# Altium PCB PCB_TP5400电池充电器测试板_2021-06-21.pcbdoc
Units mil, origin at the board's own origin, x right, y up, seen from the top; angles counter-clockwise.
Board outline 2475 x 2275 mil, 2 copper layers (Top Layer, Bottom Layer); 17 components, 13 nets, 59 pads, 2 vias.
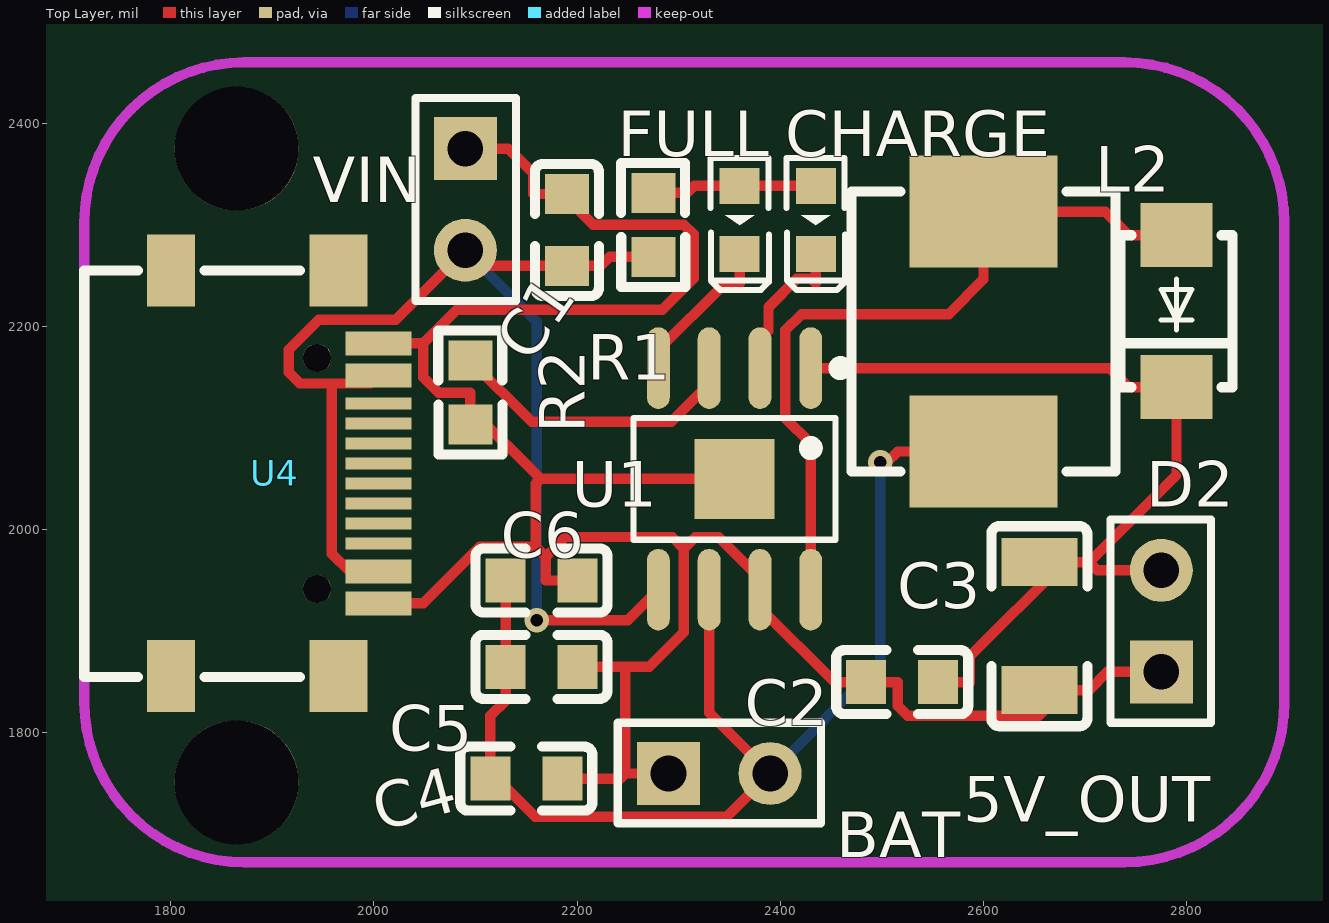
[diagram p0: Top Layer view]
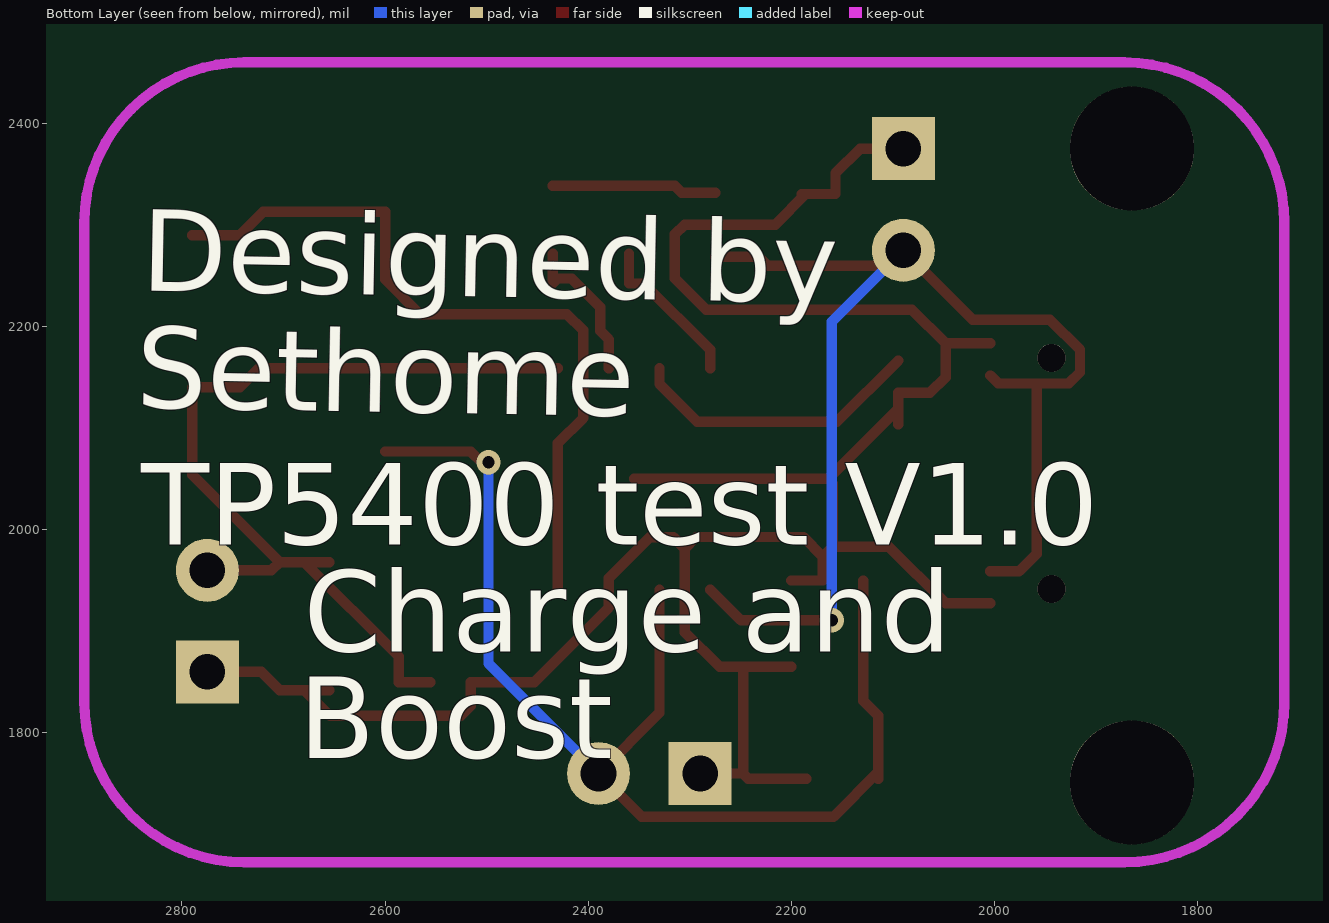
[diagram p1: Bottom Layer view, seen from below]

## Layer stack, top to bottom
Top Layer: signal copper (thickness not stored)
Dielectric: dielectric 12.6, FR-4, Dk 4.8
Bottom Layer: signal copper (thickness not stored)

## Board outline
3475,1000 1000,1000 1000,3275 3475,3275

## Components (designator, comment, footprint, x,y, rotation, side; value= is the part's Value field where it differs from the comment)
5V_OUT "HDR-F-2.54_1x2" HDR-F-2.54_1X2 2775,1910 r90 top
BAT "HDR-F-2.54_1x2" HDR-F-2.54_1X2 2340,1760 r0 top
C1 "10uF" C0603 2190,2295 r270 top
C2 "0.1uF" C0603 2520,1850 r0 top
C3 "0.1u" C1206 2655,1905 r90 top
C4 "0.1uF" C0603 2150,1755 r0 top
C5 "22uF" C0603 2165,1865 r0 top
C6 "22uF" C0603 2165,1950 r0 top
CHARGE "LED-0603_R" LED0603_RED 2435.03,2304.97 r270 top
D2 "SS34F_C908239" SMAF_L3.5-W2.6-LS4.7-FD 2790,2215 r270 top
FULL "LED-0603_G" LED0603_GREEN 2360.03,2304.97 r270 top
L2 "10uH" IND-SMD_L7.0-W6.6 2600,2195 r270 top
R1 "1k" R0603 2275,2300 r90 top
R2 "1.1k" R0603 2095,2135 r90 top
U1 "TP5400" SOIC-8_L5.0-W4.0-P1.27-LS6.0-BL-EP 2355,2050 r180 top
U4 "TYPE-C" TYPEC-16PIN-四角贴板 1965,2255 r270 top
VIN "HDR-F-2.54_1x2" HDR-F-2.54_1X2 2090,2325 r270 top

## Footprints (in the part's own frame and the unit in brackets; to place one, negate y for a bottom-side part, rotate by r counter-clockwise, add the part's x,y. Pads: shape width x height; smd on the part's side, far side on the other; paste and mask are expansions set on the pad)
C0603 [mm]
  rect 1x1.1 smd: 1(-0.9,0) 2(0.9,0)
  silkscreen extent -1.65,-0.8 1.65,0.8
C1206 [mm]
  rect 1.2x1.9 smd: 1(-1.6,0) 2(1.6,0)
  silkscreen extent -2.5,-1.2 2.5,1.2
HDR-F-2.54_1X2 [mil]
  rect 62x62 hole 35: 1(-50,0)
  round 62 hole 35: 2(50,0)
  silkscreen extent -100,-49 100,50
IND-SMD_L7.0-W6.6 [mm]
  rect 2.8x3.7 smd: 1(-3,0) 2(3,0)
  silkscreen extent -3.5,-3.3 3.5,3.3
LED0603_GREEN [mm]
  rect 0.9x1 smd: 1(-0.85,0) 2(0.85,0)
  silkscreen extent -1.54,-0.73 1.75,0.73
LED0603_RED [mm]
  rect 0.9x1 smd: 1(-0.85,0) 2(0.85,0)
  silkscreen extent -1.54,-0.73 1.75,0.73
R0603 [mm]
  rect 1x1.1 smd: 1(-0.8,0) 2(0.8,0)
  silkscreen extent -1.55,-0.8 1.55,0.81
SMAF_L3.5-W2.6-LS4.7-FD [mm]
  rect 1.6x1.8 smd: 1(-1.9,0) 2(1.9,0)
  silkscreen extent -1.9,-1.4 1.9,1.4
SOIC-8_L5.0-W4.0-P1.27-LS6.0-BL-EP [mm]
  oval 0.574x2.038 smd: 1(-1.905,-2.769) 2(-0.635,-2.769) 3(0.635,-2.769) 4(1.905,-2.769) 5(1.905,2.769) 6(0.635,2.769) 7(-0.635,2.769) 8(-1.905,2.769)
  rect 2x2 smd: 9(0,0)
  silkscreen extent -2.79,-2.92 2.53,1.52
TYPEC-16PIN-四角贴板 [mm]
  rect 0.6x1.65 smd: A1/B12(1.82,1) A4/B9(2.62,1) B1/A12(8.32,1) B4/A9(7.52,1)
  rect 0.3x1.65 smd: A5(3.82,1) A6(4.82,1) A7(5.32,1) A8(6.32,1) B5(6.82,1) B6(5.82,1) B7(4.32,1) B8(3.32,1)
  rect 1.8x1.45 smd: ""(0,0) ""(10.14,0)
  rect 1.8x1.2 smd: ""(0,-4.18) ""(10.14,-4.18)
  round 0.7 hole 0.7 unplated: ""(2.18,-0.53) ""(7.96,-0.53)
  silkscreen extent 0,-6.35 10.16,-0.96

## Free pads (board coordinates)
  round 122.05 hole 122.05 unplated: ""(1865,1751.34) ""(1865,2375)

## Via types
v1: diameter 24.02, hole 12.2, Top Layer to Bottom Layer, 2 vias

## Nets (pads, with @x,y where several pads share a name; then routed paths per layer and width w, separated by ;. In a path a pad name is that pad's centre, name@x,y a point inside that pad or via, vN(x,y) a via of type N, cw(c..) or ccw(c..) an arc to the next point about the centre after c; other vN are vias at no path point)
BAT+: BAT.2 C4.1 C5.1 C6.1 L2.2 U1.6 | length 1199.9
  Top Layer w10.24: C4.1 2114.6,1785.9 ; C6.1 C5.1 2129.6,1848.4 2129.6,1831.8 2114.6,1816.8 2114.6,1785.9 ; U1.6 2330,1820 BAT.2 2347.5,1717.5 2158.7,1717.5 2114.6,1761.6 2114.6,1785.9 ; v1(2498.3,2066.3) 2505,2066.3 2515.7,2076.9 L2.2
  Bottom Layer w10.24: BAT.2 2498.3,1868.3 v1(2498.3,2066.3)
GND: 5V_OUT.1 BAT.1 C1.1 C2.1 C3.1 C4.2 C5.2 C6.2 R2.1 U1.7 U1.9 U4.A1/B12 U4.B1/A12 VIN.1 | length 2559
  Top Layer w10.24: U4.B1/A12 2048.4,1927.4 2104.1,1983.2 2159.5,1983.2 ; U4.A1/B12 2048.4,2183.3 ; VIN.1 2132.5,2375 2156.8,2350.7 2156.8,2330.4 2177.6,2330.4 C1.1@2185.9,2330.4 ; R2.1 R2.1@2095,2119.1 ; C4.2 2242.5,1755 2247.5,1760 ; C1.1 C1.1@2185.9,2330.4 ; C5.2 2247.5,1865 ; C6.2 2169.2,1950 2169.2,1973.4 ; BAT.1 2247.5,1760 ; U1.9 2164.1,2050 ; C3.1 C3.1@2679.5,1842 ; 5V_OUT.1 2721.9,1860 2703.9,1842 C3.1@2679.5,1842 ; 2048.4,2183.3 2048.4,2150.1 2063.8,2134.7 2095,2134.7 R2.1@2095,2119.1 ; 2048.4,2183.3 2081.6,2216.6 2283.9,2216.6 2314.8,2247.5 2314.8,2290.7 2305.2,2300.3 2216,2300.3 C1.1@2185.9,2330.4 ; R2.1@2095,2119.1 2164.1,2050 ; 2159.5,1983.2 2159.5,2045.4 2164.1,2050 ; 2159.5,1983.2 2169.2,1973.4 ; 2169.2,1973.4 2188.6,1992.8 2293.7,1992.8 2305,1981.4 ; 2247.5,1760 2247.5,1865 ; 2247.5,1865 2270.9,1865 2305,1899.1 2305,1981.4 ; 2305,1981.4 2316.2,1992.6 2339.5,1992.6 2380,1952.1 U1.7 2380,1923.4 2453.4,1850 C2.1 2515.8,1850 2515.8,1826.6 2525.5,1816.8 2654.3,1816.8 C3.1@2679.5,1842
LED1_1: CHARGE.1 FULL.1 R1.2 | length 162.9
  Top Layer w10.24: R1.2 2308.2,2331.5 2315.1,2338.4 FULL.1 CHARGE.1
S$1236: U4.@1965,1855.79
S$1240: U4.@1800.43,1855.79
S$1242: U4.@1800.43,2255
S$1245: U4.@1965,2255
U1_2: CHARGE.2 U1.2 | length 153.1
  Top Layer w10.24: U1.2 2380,2187.2 2388.4,2195.6 2388.4,2219.1 2416.4,2247.2 2430.2,2247.2 2435,2242.3 CHARGE.2
U1_3: R2.2 U1.3 | length 290.9
  Top Layer w10.24: R2.2 2155.3,2106.2 2292.7,2106.2 2330,2143.5 U1.3
U1_4: FULL.2 U1.4 | length 154.2
  Top Layer w10.24: U1.4 2280,2176.9 2345.4,2242.3 2360,2242.3 FULL.2
U1_8: D2.1 L2.1 U1.8 | length 747.6
  Top Layer w10.24: U1.8 2430,2084.9 2405,2109.9 2405,2196.1 2421.1,2212.2 2565.8,2212.2 2600,2246.5 L2.1 2719.8,2313.1 2743.1,2289.8 D2.1
VIN: C1.2 R1.1 U1.5 U4.A4/B9 U4.B4/A9 VIN.2 | length 1273.7
  Top Layer w10.24: U4.B4/A9 1976.1,1958.9 1958.6,1976.4 1958.6,2143.9 ; U4.A4/B9@2004.4,2151.8 1996.4,2143.9 1958.6,2143.9 ; v1(2160.3,1910.8) 2249.8,1910.8 U1.5 ; R1.1 2232.1,2268.5 2223.2,2259.6 2206.6,2259.6 C1.2 2105.4,2259.6 VIN.2 2021.7,2206.7 1945.9,2206.7 1916.1,2176.9 1916.1,2154.9 1927.2,2143.9 1958.6,2143.9
  Bottom Layer w10.24: VIN.2 2160.3,2204.7 v1(2160.3,1910.8)
VOUT: 5V_OUT.2 C2.2 C3.2 D2.2 U1.1 | length 886.6
  Top Layer w10.24: U1.1 2724.2,2159 2743.1,2140.2 D2.2 2790,2054.1 2703.9,1968 ; C2.2 2586.6,1850 2586.6,1875.2 C3.2@2679.5,1968 ; C3.2 C3.2@2679.5,1968 ; 5V_OUT.2 2711.9,1960 2703.9,1968 ; C3.2@2679.5,1968 2703.9,1968
pads on no net: U4.@1944.13,1941.61 U4.@1944.13,2169.17 U4.A5 U4.A6 U4.A7 U4.A8 U4.B5 U4.B6 U4.B7 U4.B8

## Polygon pours and split planes (outlines as drawn)
GND on Top Layer (solid): 1500,2775 1530,2750 1530,2745 2955,2745 2975,2725 2975,1500 2940,1535 1515,1535 1530,1550 1530,2745 1500,2775
GND on Bottom Layer (solid): 1630,2620 1645,2605 2880,2605 2940,2545 2940,1620 2900,1580 1720,1580 1625,1675 1625,2675

## Keep-outs
Keep-Out Layer:
  lines w10: 1715,1830.08 ccw(c1872.48,1830.08) 1872.48,1672.6 ; 1715,2302.52 cw(c1872.48,2302.52) 1872.48,2460 ; 2738.62,1672.6 ccw(c2738.62,1830.08) 2896.1,1830.08 ; 2738.62,2460 cw(c2738.62,2302.52) 2896.1,2302.52

## Silkscreen, mask and mechanical layers (free items; w line width, h text height)
Bottom Overlay:
  text "Designed by" at 2840.7,2235.01 h80 r1
  text "Sethome" at 2845.7,2120.01 h80 r1
  text "TP5400 test V1.0" at 2840,1985 h80
  text "Charge and" at 2680,1880 h80
  text "Boost" at 2685,1775 h80